# Altium PCB PCB.PcbDoc
Units mm, origin at the board's own origin, x right, y up, seen from the top; angles counter-clockwise.
Board outline 83.5 x 99.4 mm, 4 copper layers (Signal Top, Int1 (GND), Int2 (PWR), Signal Bottom), stack 1.696 mm thick; 145 components, 109 nets, 491 pads, 48 vias.
Unrouted connection lines stored in the file: 207.
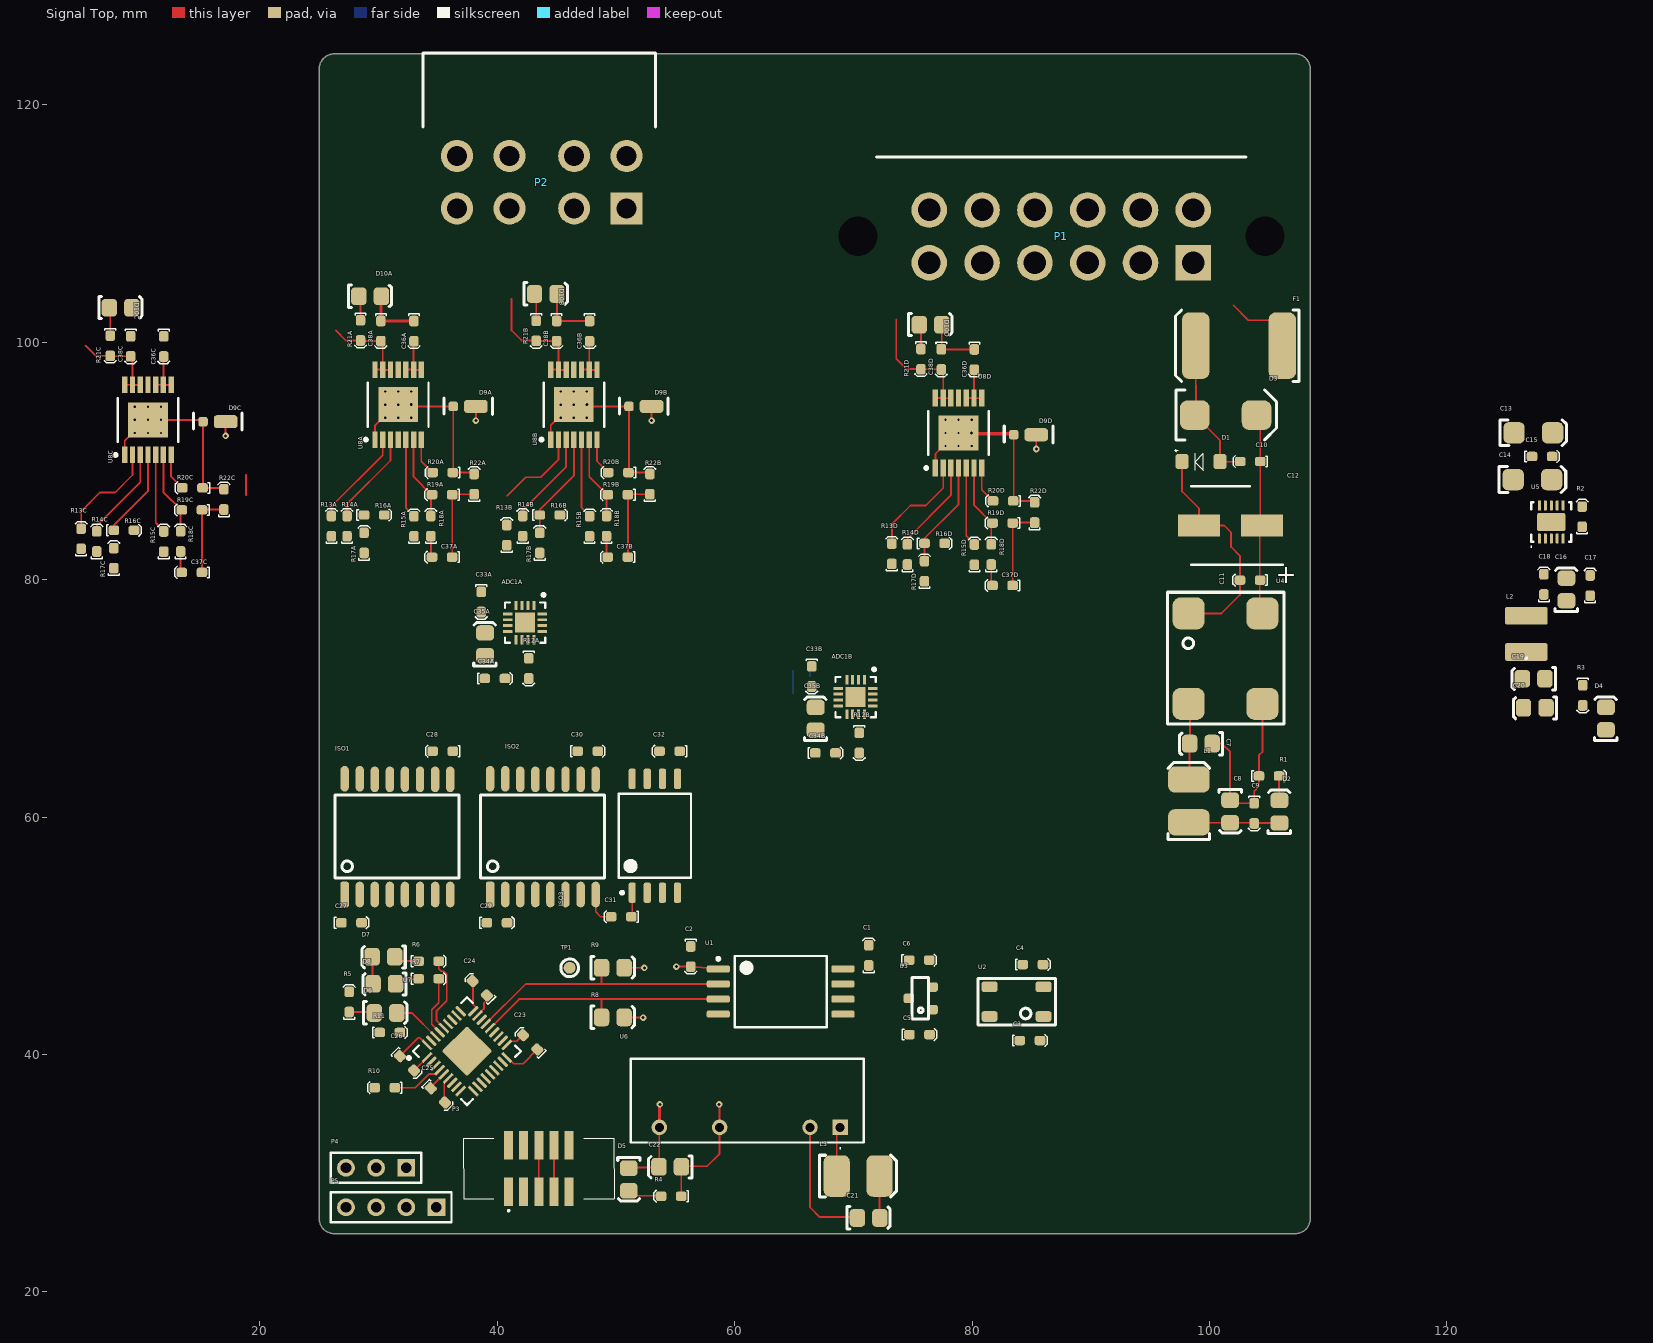
[diagram p0: Signal Top view]
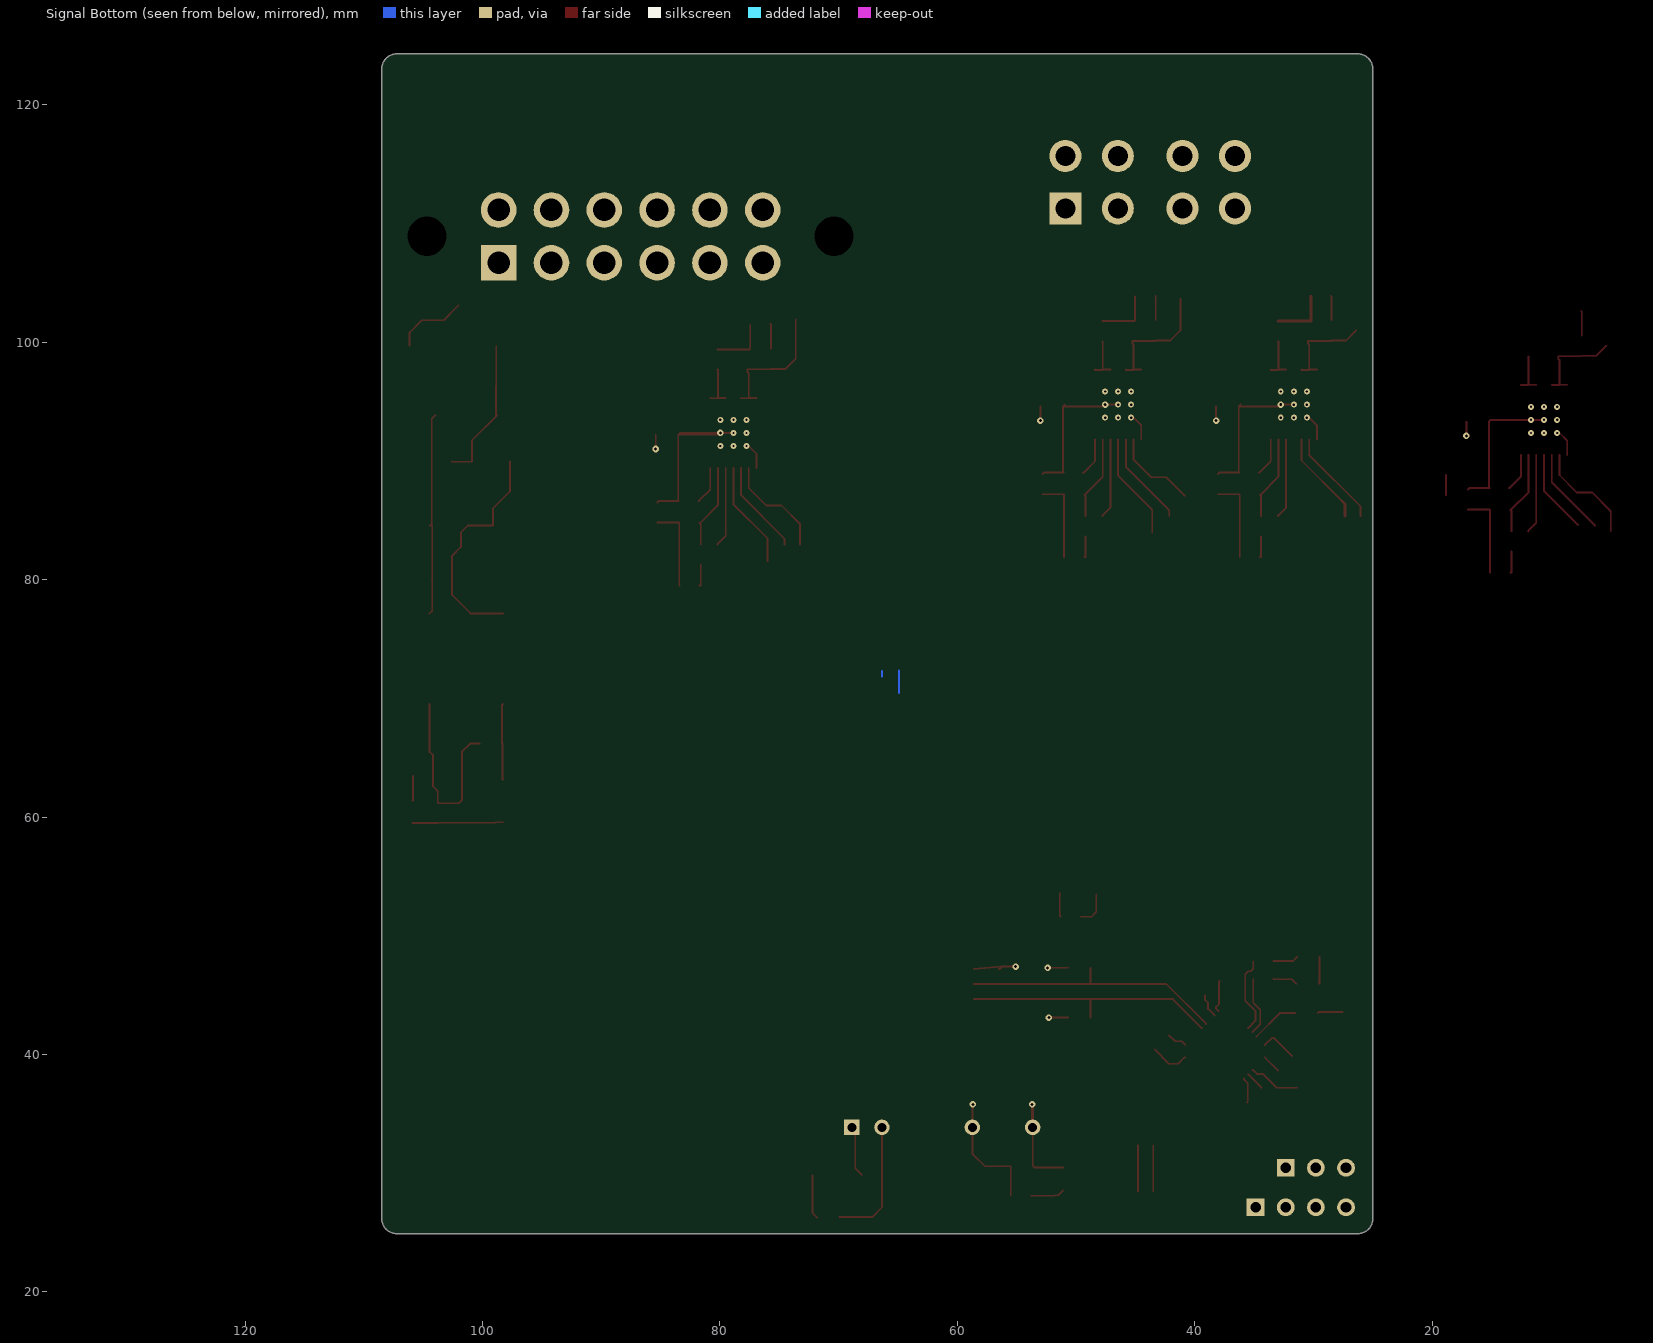
[diagram p1: Signal Bottom view, seen from below]
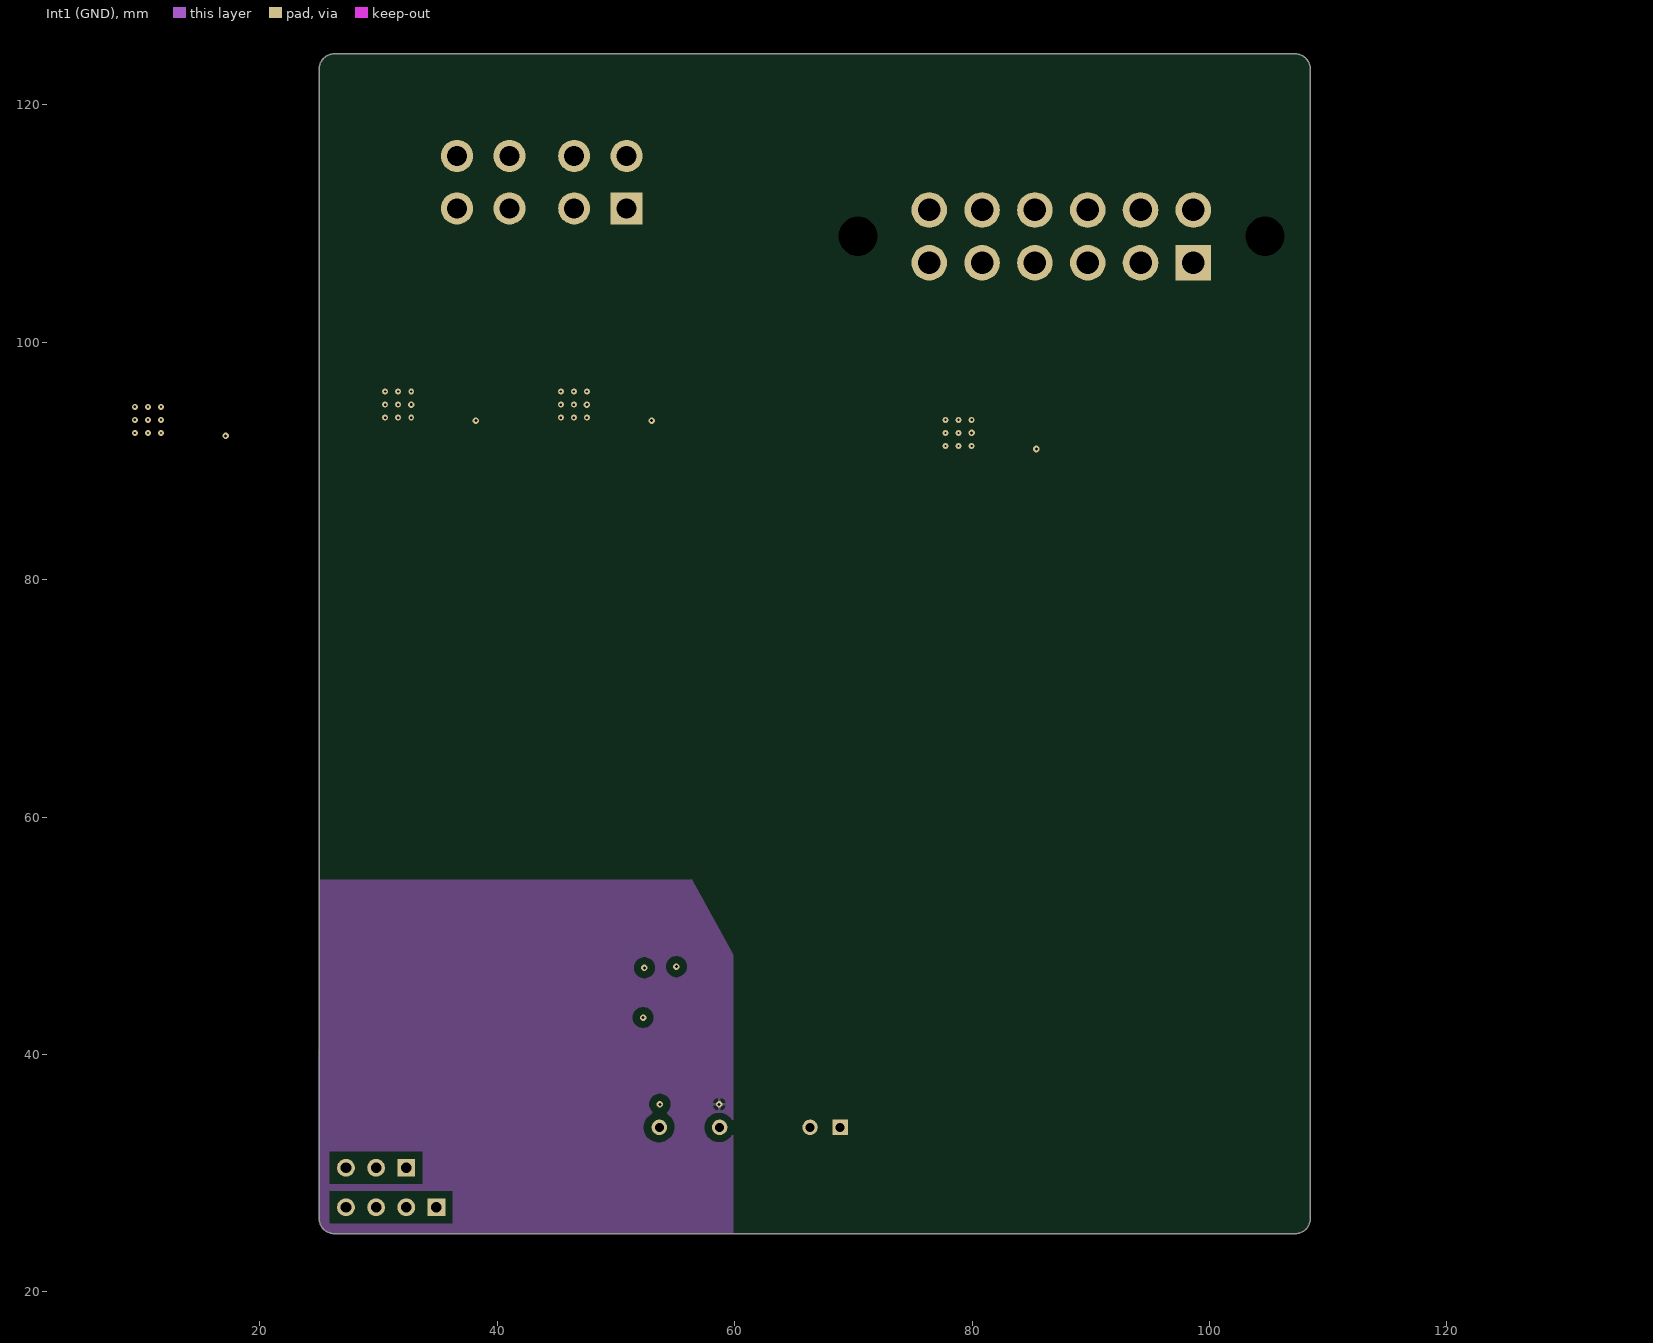
[diagram p2: Int1 (GND)]
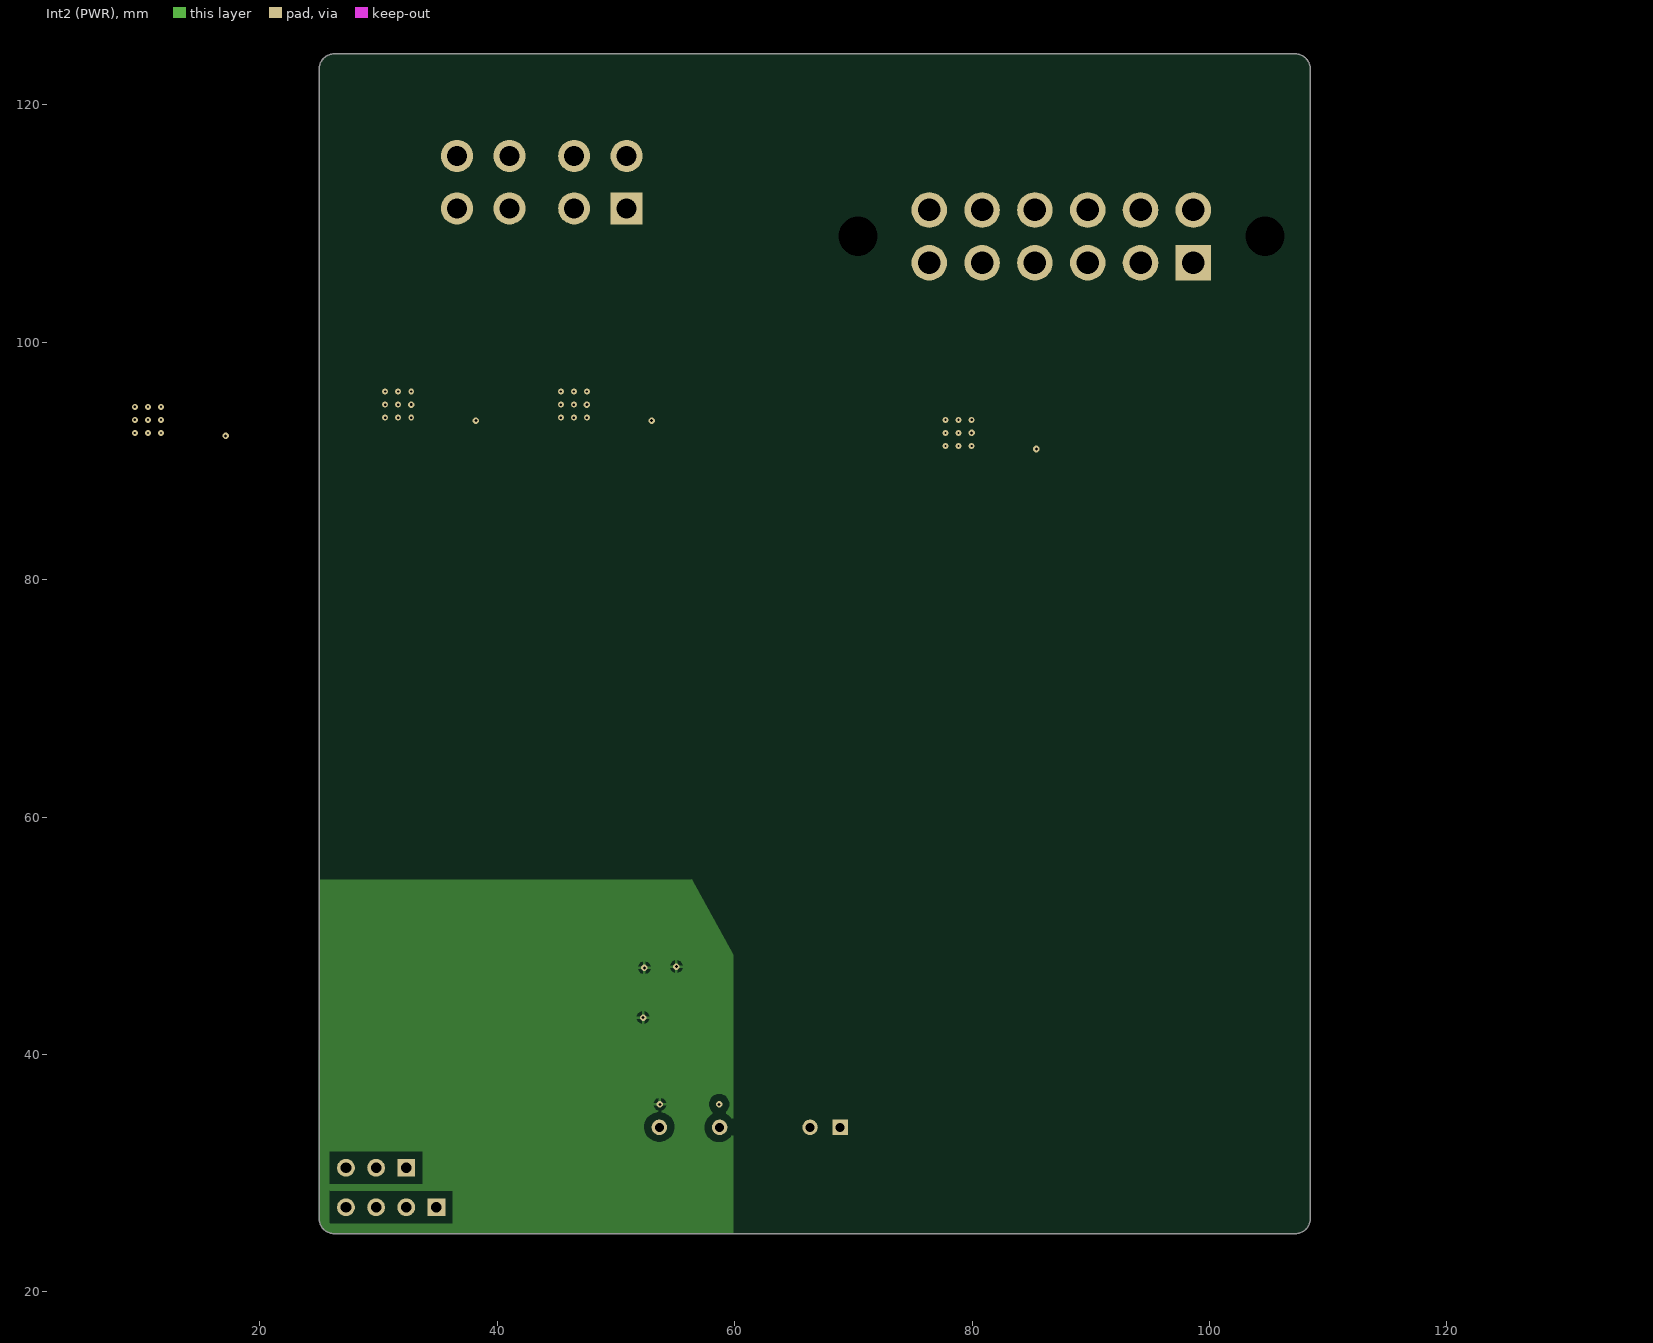
[diagram p3: Int2 (PWR)]

## Layer stack, top to bottom
Top Solder: solder mask 0.0254, SM-003, Dk 4
Signal Top: signal copper 0.07
Dielectric 1: prepreg 0.2104, PP-017, Dk 4.4
Int1 (GND): signal copper 0.035
Dielectric 2: core 1.065, Core-039, Dk 4.5
Int2 (PWR): signal copper 0.035
Dielectric 3: prepreg 0.2104, PP-017, Dk 4.4
Signal Bottom: signal copper 0.07
Bottom Solder: solder mask 0.0254, SM-003, Dk 4

## Board outline
25,26.17 ccw(c26.27,26.17) 26.27,24.9 107.23,24.9 ccw(c107.23,26.17) 108.5,26.17 108.5,123.03 ccw(c107.23,123.03) 107.23,124.3 26.27,124.3 ccw(c26.27,123.03) 25,123.03

## Design rules (kind name [scope] priority, off if disabled: settings)
Clearance [All] p1: gap=0.254 ignorepadtopadclearanceinfootprint=FALSE except(0: Arc-Hole Track-Hole SMDPad-Hole THPad-Hole Via-Hole Fill-Hole Region-Hole Text-Hole; 0.1: THPad-THPad; 0.152: Arc-SMDPad Track-SMDPad SMDPad-SMDPad; 0.2: Arc-THPad Track-THPad SMDPad-THPad THPad-Via; 0.203: Arc-Arc Arc-Track Arc-Region Track-Track Track-Region SMDPad-Region THPad-Region Via-Region Fill-Region Poly-Region Region-Region; 0.6: Arc-Poly Track-Poly SMDPad-Poly THPad-Poly Via-Poly Fill-Poly Poly-Poly)
Height [All] p1: minheight=0 maxheight=50 prefheight=12.7
HoleSize [All] p1: absolutevalues=TRUE maxlimit=10 minlimit=0.025 maxpercent=80.000 minpercent=20.000
MinimumSolderMaskSliver [All] p1 off: minsoldermaskwidth=0.254
NetAntennae [All] p1 off: netantennaetolerance=0
PlaneClearance [All] p1: clearance=0.4
PlaneConnect [All] p1: pad.planeconnectstyle=Relief pad.reliefexpansion=0.508 pad.reliefentries=4 pad.reliefconductorwidth=0.8 pad.reliefairgap=0.254 via.planeconnectstyle=Direct via.reliefexpansion=0.508 via.reliefentries=4 via.reliefconductorwidth=0.8 via.reliefairgap=0.254
PolygonConnect [All] p1: connectstyle=Relief reliefconductorwidth=0.254 reliefentries=4 polygonreliefangle="90 Angle" airgapwidth=0.254
RoomDefinition HSD1 [InComponentClass('HSD1')] p1: confinementstyle=ConfineIn formatcopy=FALSE lockcomponents=FALSE outline 40,81 25.2,81 25.2,105.3 40,105.3
RoomDefinition HSD2 [InComponentClass('HSD2')] p2: confinementstyle=ConfineIn formatcopy=TRUE lockcomponents=FALSE outline 54.8,81 40,81 40,105.3 54.8,105.3
RoomDefinition HSD3 [InComponentClass('HSD3')] p3: confinementstyle=ConfineIn formatcopy=TRUE lockcomponents=FALSE outline 18.916,79.712 4.116,79.712 4.116,104.012 18.916,104.012
RoomDefinition HSD4 [InComponentClass('HSD4')] p4: confinementstyle=ConfineIn formatcopy=TRUE lockcomponents=FALSE outline 87.216,78.612 72.416,78.612 72.416,102.912 87.216,102.912
RoomDefinition TopLevel [InComponentClass('TopLevel')] p5: confinementstyle=ConfineIn formatcopy=TRUE lockcomponents=FALSE outline 25.126,108.736 25.126,139.144 108.58,139.144 108.58,104.346 66.492,104.346 66.492,108.736
RoomDefinition ADC2 [InComponentClass('ADC2')] p6: confinementstyle=ConfineIn formatcopy=TRUE lockcomponents=FALSE outline 72.85,73.025 63.65,73.025 63.65,64.625 72.85,64.625
RoomDefinition ADC1 [InComponentClass('ADC1')] p7: confinementstyle=ConfineIn formatcopy=TRUE lockcomponents=FALSE outline 45,79.3 35.8,79.3 35.8,70.9 45,70.9
RoomDefinition CAN [InComponentClass('CAN')] p8: confinementstyle=ConfineIn formatcopy=TRUE lockcomponents=FALSE outline 55.45,40.325 87.425,40.325 87.425,50.15 55.45,50.15
RoomDefinition Microcontroller [InComponentClass('Microcontroller')] p9: confinementstyle=ConfineIn formatcopy=TRUE lockcomponents=FALSE outline 25.625,25.375 51.8,25.375 51.8,49.55 25.625,49.55
RoomDefinition "ADC Chip Select Isolation" [InComponentClass('ADC Chip Select Isolation')] p10: confinementstyle=ConfineIn formatcopy=TRUE lockcomponents=FALSE outline 49.675,50.35 56.875,50.35 56.875,66.4 49.675,66.4
RoomDefinition "High-Side Driver Enable Pin Isolator" [InComponentClass('High-Side Driver Enable Pin Isolator')] p11: confinementstyle=ConfineIn formatcopy=TRUE lockcomponents=FALSE outline 38.2,50.25 49.45,50.25 49.45,66.4 38.2,66.4
RoomDefinition "Contoller Peripheral Comms Isolation" [InComponentClass('Contoller Peripheral Comms Isolation')] p12: confinementstyle=ConfineIn formatcopy=TRUE lockcomponents=FALSE outline 25.95,50.25 37.2,50.25 37.2,66.4 25.95,66.4
RoutingVias [All] p1: holewidth=0.711 width=1.27 viastyle="Through Hole" minholewidth=0.711 minwidth=1.27 maxholewidth=0.711 maxwidth=1.27
SilkToSilkClearance [All] p1 off: silktosilkclearance=0.254
SilkToSolderMaskClearance [IsPad] p1 off: minsilkscreentomaskgap=0.254 clearancetoexposedcopper=TRUE
SolderMaskExpansion [All] p1: expansion=0.051 istentingtop=FALSE
SupplyNets "Schematic Supply Nets_8" [InNet('0V_(ISO)')] p1: voltage=0.000
SupplyNets "Schematic Supply Nets_7" [InNet('VBAT_F')] p2: voltage=0.000
SupplyNets "Schematic Supply Nets_6" [InNet('GLV-')] p3: voltage=0.000
SupplyNets "Schematic Supply Nets_5" [InNet('3V3')] p4: voltage=0.000
SupplyNets "Schematic Supply Nets_4" [InNet('VBAT_D')] p5: voltage=0.000
SupplyNets "Schematic Supply Nets_3" [InNet('5V')] p6: voltage=0.000
SupplyNets "Schematic Supply Nets_2" [InNet('GLV+')] p7: voltage=0.000
SupplyNets "Schematic Supply Nets_1" [InNet('VBAT_C')] p8: voltage=0.000
SupplyNets "Schematic Supply Nets" [InNet('0V')] p9: voltage=0.000
Width [All] p1: maxlimit=0.254 minlimit=0.254 preferedwidth=0.254
22 further rules are at their usual default settings.

## Classes and differential pairs
component class ADC2: ADC1B C33B C34B C35B R12B
component class HSD3: C36C C38C D9C
component class HSD2: C36B C37B C38B D9B D10B R14B R15B R16B R17B R18B R19B R20B R21B R22B U8B
component class HSD1: C36A C37A C38A D9A D10A R13A R14A R15A R16A R17A R18A R19A R20A R21A R22A U8A
component class ADC1: ADC1A C33A C34A C35A R12A
channel class "High-Side Driver": HSD1 HSD2 HSD3 HSD4
channel class "ADC GPIO Expander": ADC1 ADC2
component class TopLevel: P1 P2
component class "Power Supply": C7 C8 C9 C10 C11 C12 C13 C14 C15 C16 C17 C18 C19 C20 C21 C22 D1 D2 D3 D4 D5 F1 L1 L2 L3 R1 R2 R3 R4 U4 U5 U6
component class Microcontroller: C23 C24 C25 C26 D6 D7 D8 P3 P4 P5 R5 R6 R7 R8 R9 R10 R11 TP1 U7
component class HSD4: *_HSD2 C36D C37D C38D D9D D10D R13D R14D R15D R16D R17D R18D R19D R20D R21D R22D U8D
component class "High-Side Driver Enable Pin Isolator": C29 C30 ISO2
component class "Contoller Peripheral Comms Isolation": C27 C28 ISO1
component class CAN: C1 C2 C3 C4 C5 C6 U1 U2 U3
component class "ADC Chip Select Isolation": C32 ISO3

## Components (designator, comment, footprint, x,y, rotation, side; value= is the part's Value field where it differs from the comment)
ADC1A "ADS7028IRTER-Symbol-1" WFQN-16 42.35,76.375 r270 top (schematic designator ADC1)
ADC1B "ADS7028IRTER-Symbol-1" WFQN-16 70.2,70.1 r270 top (schematic designator ADC1)
C1 "100nF" 0603 71.3,47.5 r90 top
C2 "100nF" 0603 56.3,49.1 r270 top
C3 "100pF" 0603 84.025,41.175 r0 top
C4 "100pF" 0603 84.275,47.575 r0 top
C5 "100pF" 0603 74.725,41.675 r0 top
C6 "100pF" 0603 74.7,47.95 r0 top
C7 "10uF" 0805 99.274,66.162 r180 top
C8 "10uF" 0805 101.774,60.462 r270 top
C9 "100nF" 0603 103.774,61.162 r270 top
C10 "100nF" 0603 104.293,89.957 r180 top
C11 "100nF" 0603 104.274,79.962 r180 top
C12 "47uF" "CHEMI-CON ELCO" 101.774,84.562 r180 top
C13 "4.7uF" "1206 CAP" 128.479,92.379 r0 top
C14 "4.7uF" "1206 CAP" 128.404,88.432 r0 top
C15 "100nF" 0603 127.179,90.379 r0 top
C16 "1µF" 0805 130.054,79.182 r90 top
C17 "10nF" 0603 132.079,78.657 r90 top
C18 "100nF" 0603 128.179,78.757 r90 top
C19 "10uF" 0805 127.304,71.632 r180 top
C20 "10uF" 0805 127.404,69.182 r180 top
C21 "10uF" 0805 71.304,26.257 r0 top
C22 "10uF" 0805 54.554,30.507 r180 top
C23 "100nF" 0603 43.377,40.423 r135 top
C24 "100nF" 0603 39.125,44.975 r135 top
C25 "100nF" 0603 34.398,37.152 r315 top
C26 "100nF" 0603 31.798,39.852 r315 top
C27 "100nF" 0603 26.869,51.1 r0 top
C28 "100nF" 0603 36.26,65.55 r180 top
C29 "100nF" 0603 39.126,51.1 r0 top
C30 "100nF" 0603 46.775,65.55 r0 top
C31 "100nF" 0603 51.3,51.6 r180 top
C32 "100nF" 0603 55.375,65.55 r180 top
C33A "100nF" 0603 38.65,78.975 r270 top (schematic designator C33)
C33B "100nF" 0603 66.5,72.7 r270 top (schematic designator C33)
C34A "100nF" 0603 38.95,71.675 r0 top (schematic designator C34)
C34B "100nF" 0603 66.8,65.4 r0 top (schematic designator C34)
C35A "1µF" 0805 38.95,74.575 r90 top (schematic designator C35)
C35B "1µF" 0805 66.8,68.3 r90 top (schematic designator C35)
C36A "100nF" 0603 32.984,101.788 r270 top (schematic designator C36)
C36B "100nF" 0603 47.784,101.788 r270 top (schematic designator C36)
C36C "100nF" 0603 11.9,100.5 r270 top (schematic designator C36)
C36D "100nF" 0603 80.2,99.4 r270 top (schematic designator C36)
C37A "100nF" 0603 36.206,81.9 r180 top (schematic designator C37)
C37B "100nF" 0603 51.006,81.9 r180 top (schematic designator C37)
C37C "100nF" 0603 15.123,80.612 r180 top (schematic designator C37)
C37D "100nF" 0603 83.423,79.512 r180 top (schematic designator C37)
C38A "22nF" 0603 30.2,101.8 r270 top (schematic designator C38)
C38B "22nF" 0603 45,101.8 r270 top (schematic designator C38)
C38C "22nF" 0603 9.117,100.512 r270 top (schematic designator C38)
C38D "22nF" 0603 77.416,99.412 r270 top (schematic designator C38)
D1 "PMEG100T10ELR-QX" "NXP SOD123W" 99.293,89.957 r0 top
D2 "Red" "0805 LED" 105.874,60.462 r90 top
D3 "SM6T36CAY" "ST SMB DIODE" 101.374,93.862 r180 top
D4 "Red" "0805 LED" 133.379,68.307 r90 top
D5 "Red" "0805 LED" 51.104,29.457 r270 top
D6 "Yellow" "0805 LED" 30.6,43.525 r0 top
D7 "Yellow" "0805 LED" 30.4,48.2 r180 top
D8 "Yellow" "0805 LED" 30.475,45.925 r180 top
D9A "MSX1PJ-M3/89A" "VISHAY DO-219" 38.2,94.6 r180 top (schematic designator D9)
D9B "MSX1PJ-M3/89A" "VISHAY DO-219" 53,94.6 r180 top (schematic designator D9)
D9C "MSX1PJ-M3/89A" "VISHAY DO-219" 17.116,93.312 r180 top (schematic designator D9)
D9D "MSX1PJ-M3/89A" "VISHAY DO-219" 85.416,92.212 r180 top (schematic designator D9)
D10A "Red" "0805 LED" 29.3,103.9 r0 top (schematic designator D10)
D10B "Red" "0805 LED" 44.1,104.1 r0 top (schematic designator D10)
D10C "Red" "0805 LED" 8.279,102.938 r0 top (schematic designator D10)
D10D "Red" "0805 LED" 76.516,101.512 r0 top (schematic designator D10)
F1 "0ZCF0100AF2A" 2920 106.149,99.712 r180 top
ISO1 "ADum1401" "AD 16-SOIC" 32.86,58.352 r0 top
ISO2 "ADuM1400" "AD 16-SOIC" 45.117,58.352 r0 top
ISO3 "ADuM225N" AD-SOIC-8W 53.275,58.425 r90 top
L1 "12uH" 1812 98.274,61.362 r90 top
L2 "4.7uH" SRN3015TA-4R7M 126.704,75.432 r90 top
L3 "12uH" 1812 70.404,29.757 r0 top
P1 "DTF13-12P" DTF13-12P 87.536,111.15 r180 top
P2 "ATF13-08" ATF13-08 43.755,113.49 r180 top
P3 "1.27mm" 3221-10-0300-00 43.5,30.4 r0 top
P4 "2.54mm" "TH 2.54mm Header 1x3" 32.335,30.45 r180 top
P5 "2.54mm" "TH 2.54mm Header 1x4" 34.875,27.125 r180 top
R1 "20K" 0603 104.174,63.462 r0 top
R2 "100K" 0603 131.404,84.457 r90 top
R3 "2K" 0603 131.454,71.107 r270 top
R4 "1k" 0603 55.504,28.057 r180 top
R5 "500R" 0603 27.525,43.575 r90 top
R6 "500R" 0603 33.375,47.85 r0 top
R7 "500R" 0603 33.375,46.375 r0 top
R8 "5.1k" 0805 49.75,43.15 r0 top
R9 "5.1k" 0805 49.75,47.325 r0 top
R10 "10k" 0603 31.375,37.2 r180 top
R11 "10k" 0603 30.1,41.85 r0 top
R12A "100K" 0603 42.65,73.375 r270 top (schematic designator R12)
R12B "100K" 0603 70.5,67.1 r270 top (schematic designator R12)
R13A "10k" 0603 26.034,83.663 r90 top (schematic designator R13)
R13B "10k" 0603 40.8,82.9 r90 top (schematic designator R13)
R13C "10k" 0603 4.939,82.598 r90 top (schematic designator R13)
R13D "10k" 0603 73.244,81.334 r90 top (schematic designator R13)
R14A "10k" 0603 27.346,83.663 r90 top (schematic designator R14)
R14B "10k" 0603 42.146,83.663 r90 top (schematic designator R14)
R14C "10k" 0603 6.262,82.375 r90 top (schematic designator R14)
R14D "10k" 0603 74.562,81.275 r90 top (schematic designator R14)
R15A "10k" 0603 32.981,83.65 r90 top (schematic designator R15)
R15B "10k" 0603 47.781,83.65 r90 top (schematic designator R15)
R15C "10k" 0603 11.898,82.362 r90 top (schematic designator R15)
R15D "10k" 0603 80.198,81.262 r90 top (schematic designator R15)
R16A "10k" 0603 28.781,85.45 r0 top (schematic designator R16)
R16B "10k" 0603 43.581,85.45 r0 top (schematic designator R16)
R16C "10k" 0603 7.698,84.162 r0 top (schematic designator R16)
R16D "10k" 0603 75.998,83.062 r0 top (schematic designator R16)
R17A "10k" 0603 28.781,82.25 r90 top (schematic designator R17)
R17B "10k" 0603 43.581,82.25 r90 top (schematic designator R17)
R17C "10k" 0603 7.698,80.962 r90 top (schematic designator R17)
R17D "10k" 0603 75.998,79.862 r90 top (schematic designator R17)
R18A "10k" 0603 34.409,83.663 r90 top (schematic designator R18)
R18B "10k" 0603 49.209,83.663 r90 top (schematic designator R18)
R18C "10k" 0603 13.325,82.375 r90 top (schematic designator R18)
R18D "10k" 0603 81.625,81.275 r90 top (schematic designator R18)
R19A "1k" 0603 36.209,87.163 r180 top (schematic designator R19)
R19B "1k" 0603 51.009,87.163 r180 top (schematic designator R19)
R19C "1k" 0603 15.125,85.875 r180 top (schematic designator R19)
R19D "1k" 0603 83.425,84.775 r180 top (schematic designator R19)
R20A "24k" 0603 36.256,89.025 r180 top (schematic designator R20)
R20B "24k" 0603 51.056,89.025 r180 top (schematic designator R20)
R20C "24k" 0603 15.173,87.737 r180 top (schematic designator R20)
R20D "24k" 0603 83.473,86.637 r180 top (schematic designator R20)
R21A "10k" 0603 28.481,101.85 r270 top (schematic designator R21)
R21B "10k" 0603 43.281,101.818 r270 top (schematic designator R21)
R21C "10k" 0603 7.398,100.562 r270 top (schematic designator R21)
R21D "10k" 0603 75.698,99.429 r270 top (schematic designator R21)
R22A "1k" 0603 38.057,87.2 r90 top (schematic designator R22)
R22B "1k" 0603 52.857,87.2 r90 top (schematic designator R22)
R22C "1k" 0603 16.973,85.911 r90 top (schematic designator R22)
R22D "1k" 0603 85.273,84.811 r90 top (schematic designator R22)
TP1 "Test Point Small" "SMD Test Point 1mm" 46.1,47.3 r0 top
U1 "ISO1042" TI-SOIC-8 63.875,45.3 r0 top
U2 "B82787C0104H002" "TDK 4-PC Pad" 86.025,43.2 r180 top value="100µH @ 100kHz"
U3 "NUP2105L" "ON SOT-23" 75.675,44.725 r90 top
U4 "744272121" "Wurth 4-PC Pad" 104.474,69.542 r90 top value="120uH @ 100kHz"
U5 "LM536015QDSXRQ1" TI_10_WSON 128.804,84.857 r90 top
U6 "RK-053.3S/H6" RK-053.3S/H6 68.894,33.854 r180 top
U7 "STM32F103T8U6" STM_QFN-36 37.45,40.275 r45 top
U8A "TPS1HTC30AQPWPRQ1" TI_14_TSSOP 31.656,94.75 r90 top (schematic designator U8)
U8B "TPS1HTC30AQPWPRQ1" TI_14_TSSOP 46.456,94.75 r90 top (schematic designator U8)
U8C "TPS1HTC30AQPWPRQ1" TI_14_TSSOP 10.573,93.462 r90 top (schematic designator U8)
U8D "TPS1HTC30AQPWPRQ1" TI_14_TSSOP 78.867,92.362 r90 top (schematic designator U8)

## Footprints (in the part's own frame and the unit in brackets; to place one, negate y for a bottom-side part, rotate by r counter-clockwise, add the part's x,y. Pads: shape width x height; smd on the part's side, far side on the other; paste and mask are expansions set on the pad)
0603 [mm]
  rrect50% 0.9x0.8 smd: 1(0,0) 2(1.7,0)
  silkscreen extent -0.6,-0.5 2.3,0.5, body extent 0.05,-0.42 1.65,0.43, height 0.6
0805 [mm]
  rrect50% 1.3x1.5 smd: 1(-0.962,-0.026) 2(0.938,-0.026)
  silkscreen extent -1.85,-0.95 1.8,0.93, body extent -1,-0.65 1,0.66, height 0.73
"0805 LED" [mm]
  rrect50% 1.3x1.5 smd: A(-0.962,-0.026) K(0.938,-0.026)
  silkscreen extent -1.85,-0.95 1.8,0.93, body extent -1.09,-0.63 0.91,0.63, height 1
"1206 CAP" [mm]
  rrect50% 1.8x1.8 smd: 1(-2.81,0) 2(0.44,0)
  silkscreen extent -3.99,-1.09 1.62,1.09, body extent -2.75,-0.79 0.45,0.81, height 1.61
1812 [mm]
  rrect50% 2.2x3.5 smd: 1(-1.8,0) 2(1.8,0)
  silkscreen extent -3.25,-1.75 3.25,1.75, body extent -2.25,-1.6 2.25,1.6, height 2.5
2920 [mm]
  rrect50% 2.3x5.6 smd: 1(0,0) 2(7.3,0)
  silkscreen extent -1.4,-3 9,3, body extent -0.34,-2.81 7.64,2.81, height 1.14
3221-10-0300-00 [mm]
  rect 0.76x2.4 smd: 1(-2.54,-1.95) 2(-2.54,1.95) 3(-1.27,-1.95) 4(-1.27,1.95) 5(0,-1.95) 6(0,1.95) 7(1.27,-1.95) 8(1.27,1.95) 9(2.54,-1.95) 10(2.54,1.95)
  silkscreen extent -6.35,-3.6 6.35,2.55, body extent -6.34,-2.8 6.36,2.8, height 5.25
"AD 16-SOIC" [mil]
  rrect50% 28x85 smd: 1(-225,-192.02)
  oval 28x85 smd: 2(-175,-192.02) 3(-125,-192.02) 4(-75,-192.02) 5(-25,-192.02) 6(25,-192.02) 7(75,-192.02) 8(125,-192.02) 9(125,190) 10(75,189.96) 11(25,189.96) 12(-25,189.96) 13(-75,189.96) 14(-125,189.96) 15(-175,191.98) 16(-225,191.98)
  silkscreen extent -257,-138 155,138, body extent -256,-209 156,209, height 104
AD-SOIC-8W [mm]
  rrect50% 1.7x0.6 smd: 1(-4.8,1.905) 2(-4.8,0.635) 3(-4.8,-0.635) 4(-4.8,-1.905) 5(4.8,-1.905) 6(4.8,-0.635) 7(4.8,0.635) 8(4.8,1.905)
  silkscreen extent -4.92,-3.05 3.55,3.05, body extent -5.16,-3.05 5.16,3.05, height 2.65
ATF13-08 [mm]
  rect 2.7x2.7 hole 1.7: 1(-7.145,2.21)
  round 2.7 hole 1.7: 2(-2.725,2.21) 3(2.725,2.21) 4(7.145,2.21) 5(7.145,-2.21) 6(2.725,-2.21) 7(-2.725,-2.21) 8(-7.145,-2.21)
  silkscreen extent -9.57,-10.87 10.03,-4.67, body extent -18.38,-25.4 18.38,4.5, height 23.66
"CHEMI-CON ELCO" [mm]
  rect 3.55x1.85 smd: 1(-2.65,0) 2(2.65,0)
  silkscreen extent -4.42,-3.3 3.3,3.3, body extent -3.7,-3.4 3.7,3.4, height 6.1
DTF13-12P [mm]
  round 3 hole 3.3 unplated: 0(-17.145,2.22) 0(17.145,2.22)
  rect 3x3 hole 1.9: 1(-11.114,4.45)
  round 3 hole 1.9: 2(-6.664,4.45) 3(-2.214,4.45) 4(2.236,4.45) 5(6.686,4.45) 6(11.136,4.45) 7(11.136,0) 8(6.686,0) 9(2.236,0) 10(-2.214,0) 11(-6.664,0) 12(-11.114,0)
  silkscreen extent -15.56,-4.45 15.59,-4.45, body extent -20.79,-27.74 20.79,6.55, height 23.13
"NXP SOD123W" [mm]
  rrect50% 1.1x1.3 smd: A(1.6,0) K(-1.6,0)
  silkscreen extent -2.2,-0.73 0.2,1.04, body extent -1.75,-0.95 1.75,0.95, height 1.1
"ON SOT-23" [mm] "NUP2105L"
  rrect50% 0.8x0.9 smd: 1(-0.95,-1) 2(0.95,-1) 3(0,1)
  silkscreen extent -1.75,-0.65 1.75,0.75, body extent -1.5,-1.27 1.5,1.28, height 1
RK-053.3S/H6 [mm]
  rect 1.303x1.303 hole 0.76: 1(0,0)
  round 1.303 hole 0.76: 2(2.54,0) 5(10.16,0) 7(15.24,0)
  silkscreen extent -2,-5.78 17.65,1.8, body extent -1.99,-5.78 17.65,1.26, height 10.2
"SMD Test Point 1mm" [mm]
  round 1 smd: 1(0,0)
  silkscreen extent -0.75,-0.75 0.75,0.75
SRN3015TA-4R7M [mm]
  rrect25% 1.5x3.6 smd: 1(-1.525,0) 2(1.525,0)
  silkscreen extent -2.1,-0.05 -2,0.05, body extent -1.46,-1.47 1.61,1.47, height 1.4
"ST SMB DIODE" [mm]
  rrect50% 2.5x2.5 smd: A(2.6,0) K(-2.6,0)
  silkscreen extent -4.28,-2.12 4.17,2.08, body extent -2.88,-1.99 2.72,1.95, height 2.5
STM_QFN-36 [mm]
  rrect50% 1.1x0.25 smd: 1(-2.75,2) 2(-2.75,1.5) 3(-2.75,1) 4(-2.75,0.5) 5(-2.75,0) 6(-2.75,-0.5) 7(-2.75,-1) 8(-2.75,-1.5) 9(-2.75,-2) 19(2.75,-2) 20(2.75,-1.5) 21(2.75,-1) 22(2.75,-0.5) 23(2.75,0) 24(2.75,0.5) 25(2.75,1) 26(2.75,1.5) 27(2.75,2)
  rrect50% 0.25x1.1 smd: 10(-2,-2.75) 11(-1.5,-2.75) 12(-1,-2.75) 13(-0.5,-2.75) 14(0,-2.75) 15(0.5,-2.75) 16(1,-2.75) 17(1.5,-2.75) 18(2,-2.75) 28(2,2.75) 29(1.5,2.75) 30(1,2.75) 31(0.5,2.75) 32(0,2.75) 33(-0.5,2.75) 34(-1,2.75) 35(-1.5,2.75) 36(-2,2.75)
  rrect10% 3x3 smd: 37(0,0)
  silkscreen extent -3.98,-3.21 3.21,3.21, body extent -3.08,-3.08 3.08,3.08, height 1
"TDK 4-PC Pad" [mm]
  rrect50% 1.35x0.9 smd: 1(0,-2.5) 2(0,0) 3(4.55,0) 4(4.55,-2.5)
  silkscreen extent -1,-3.2 5.5,0.7, body extent -0.02,-2.82 4.48,0.38, height 2.8
"TH 2.54mm Header 1x3" [mm]
  rect 1.5x1.5 hole 0.9: 1(0,0)
  round 1.5 hole 0.9: 2(2.54,0) 3(5.08,0)
  silkscreen extent -1.27,-1.27 6.35,1.27, body extent -1.27,-1.27 6.35,1.27, height 9.5
"TH 2.54mm Header 1x4" [mm]
  rect 1.5x1.5 hole 0.9: 1(0,0)
  round 1.5 hole 0.9: 2(2.54,0) 3(5.08,0) 4(7.62,0)
  silkscreen extent -1.27,-1.27 8.89,1.27, body extent -1.27,-1.27 8.89,1.27, height 9.5
TI-SOIC-8 [mm]
  rrect50% 1.95x0.6 smd: 1(-5.25,1.905) 2(-5.25,0.635) 3(-5.25,-0.635) 4(-5.25,-1.905) 5(5.25,-1.905) 6(5.25,-0.635) 7(5.25,0.635) 8(5.25,1.905)
  silkscreen extent -5.37,-3 3.87,3, body extent -5.75,-3 5.75,3, height 2.8
TI_10_WSON [mm]
  rrect50% 0.85x0.25 smd: 1(-1.395,1) 2(-1.395,0.5) 3(-1.395,0) 4(-1.395,-0.5) 5(-1.395,-1) 6(1.395,-1) 7(1.395,-0.5) 8(1.395,0) 9(1.395,0.5) 10(1.395,1)
  rrect25% 1.54x2.4 smd: 11(0,0)
  silkscreen extent -2.12,-1.68 1.67,1.72, body extent -1.58,-1.53 1.58,1.53, height 0.8
TI_14_TSSOP [mm] "TSOP, 14-Leads, Body 5.00x4.40mm, Pitch 0.65mm, Thermal Pad 3.34x2.94mm, IPC Medium Density"
  rect 2.94x3.34 smd: 0(0,0)
  rect 1.4x0.45 smd: 1(-2.95,1.95) 2(-2.95,1.3) 3(-2.95,0.65) 4(-2.95,0) 5(-2.95,-0.65) 6(-2.95,-1.3) 7(-2.95,-1.95) 8(2.95,-1.95) 9(2.95,-1.3) 10(2.95,-0.65) 11(2.95,0) 12(2.95,0.65) 13(2.95,1.3) 14(2.95,1.95)
  silkscreen extent -3.07,-2.55 1.85,2.85, body extent -3.2,-2.55 3.2,2.55, height 1.2
"VISHAY DO-219" [mm]
  rrect50% 0.8x0.8 smd: A(1.9,0)
  rrect50% 2x1.1 smd: K(0,0)
  silkscreen extent -1.4,-0.73 2.7,0.7
WFQN-16 [mm]
  rect 0.8x0.25 smd: 1(-1.45,0.75) 2(-1.45,0.25) 3(-1.45,-0.25) 4(-1.45,-0.75) 9(1.45,-0.75) 10(1.45,-0.25) 11(1.45,0.25) 12(1.45,0.75)
  rect 0.25x0.8 smd: 5(-0.75,-1.45) 6(-0.25,-1.45) 7(0.25,-1.45) 8(0.75,-1.45) 13(0.75,1.45) 14(0.25,1.45) 15(-0.25,1.45) 16(-0.75,1.45)
  rect 1.68x1.68 smd: 17(0,0)
  silkscreen extent -2.47,-1.7 1.7,1.7, body extent -1.6,-1.6 1.6,1.6, height 0.8
"Wurth 4-PC Pad" [mm]
  rrect50% 2.7x2.7 smd: 1(7.62,6.22) 2(0,6.22) 3(0,0) 4(7.62,0)
  silkscreen extent -1.7,-1.8 9.4,8, body extent -1.19,-1.24 8.81,7.46, height 6.2

## Part data
ADC1A ADC1B: library part ADS7028IRTER, "IC ADC 12BIT SAR 16WQFN", Manufacturer="Texas Instruments", Complex IC=1, Digikey Link=https://www.digikey.com.au/en/products/detail/texas-instruments/ADS7028IRTER/12696020?s=N4IgTCBcDaIIIBEDKB2ADGAHASQEoBUBRXEAXQF8g, Digikey Part Number=ADS7028IRTER, Part Number=ADS7028IRTER
C1 C2 C9 C10 C11 C15 C18 C23 C24 C25 C26 C27 C28 C29 C30 C31 C32 C33A C33B C34A C34B C36A C36B C36C C36D C37A C37B C37C C37D: library part GCM188L81H104KA57D, Digikey Part Number=490-6049-1-ND, Manufacturer=muRata, Rated Voltage=50V, Temperature Rating=X8L, Tolerance=±10%, Material=MLCC, Part Number=GCM188L81H104KA57D
C3 C4 C5 C6: library part GRM1885C1H101JA01D, Digikey Part Number=490-1427-1-ND, Manufacturer="Murata Electronics", Rated Voltage=50V, Temperature Rating="C0G, NP0", Tolerance=±5%, Material=MLCC, Part Number=GRM1885C1H101JA01D
C7 C8 C19 C20 C21 C22: library part GRM21BR6YA106KE43L, Digikey Part Number=490-10514-6-ND, Manufacturer=muRata, Rated Voltage=50V, Temperature Rating=X5R, Tolerance=10%, Material=MLCC, Part Number=GRM21BR6YA106KE43L
C12: library part HHXA350ARA470MF61G, Part Number=HHXA350ARA470MF61G
C13 C14: library part GRM31CR71H475KA12K, Digikey Part Number=490-GRM31CR71H475KA12KTR-ND, Manufacturer="Murata Electronics", Rated Voltage=50V, Temperature Rating=X7R, Tolerance=±10%, Material=MLCC, Part Number=GRM31CR71H475KA12K
C16 C35A C35B: library part GCM21BR71H105KA03L, Digikey Part Number=490-10675-1-ND, Manufacturer=muRata, Rated Voltage=50V, Temperature Rating=X7R, Tolerance=±10%, Material=MLCC, Part Number=GCM21BR71H105KA03L
C17: library part GCM188L81H103KA03D, Digikey Part Number=490-GCM188L81H103KA03DCT-ND, Manufacturer=muRata, Rated Voltage=50V, Temperature Rating=X8L, Tolerance=±10%, Material=MLCC, Part Number=GCM188L81H103KA03D
C38A C38B C38C C38D: library part GCM188R71H223KA37J, Digikey Part Number=490-8022-2-ND, Manufacturer="Murata Electronics", Rated Voltage=50V, Temperature Rating=X7R, Tolerance=±10%, Material=MLCC, Part Number=GCM188R71H223KA37J
D1: Breakdown Voltage="100 V", Digikey Part Number=1727-PMEG100T10ELR-QXCT-ND, Forward Voltage="0.75 V @ 1A", Manufacturer="Nexperia USA Inc.", Rated Power="680 mW", Part Number=PMEG100T10ELR-QX
D2 D4 D5 D10A D10B D10C D10D: library part SML-210LTT86, "Red LED Indication - Discrete 1.75V 0805 (2012 Metric)", Digikey Part Number=511-1286-1-ND, Manufacturer="ROHM Semiconductor", Colour=Red, Part Number=SML-210LTT86
D3: Breakdown Voltage="30.8 V", Digikey Part Number=497-10804-1-ND, Manufacturer=STMicroelectronics, Rated Power=600W, Forward Voltage="30.8 V", Part Number=SM6T36CAY
D6 D7 D8: library part SML-211YTT86, "Yellow LED Indication - Discrete 1.75V 0805 (2012 Metric)", Digikey Part Number=511-1293-1-ND, Manufacturer="ROHM Semiconductor", Colour=Yellow, Part Number=SML-211YTT86
D9A D9B D9C D9D: Breakdown Voltage=600V, Manufacturer="Vishay General Semiconductor - Diodes Division", Part Number=MSX1PJ-M3/89A
F1: "PTC RESET FUSE 60V 1A 292", Digikey Part Number=507-2070-1-ND, Manufacturer="Littelfuse Inc.", Digikey Link=https://www.digikey.com/product-detail/en/bel-fuse-inc/0ZCF0100AF2A/507-2070-1-ND/6210547, Part Number=0ZCF0100AF2A
ISO1: library part ADuM1401, "General Purpose Digital Isolator 2500Vrms 4 Channel 1Mbps 25kV/µs CMTI 16-SOIC (0.295\", 7.50mm Width)", Manufacturer="Analog Devices", Complex IC=0, Part Number=ADuM1401
ISO2: "General Purpose Digital Isolator 2500Vrms 4 Channel 1Mbps 25kV/µs CMTI 16-SOIC (0.295\", 7.50mm Width)", Digikey Part Number=ADUM1400WSRWZ-ND, Manufacturer="Analog Devices", Complex IC=0, Digikey Link=https://www.digikey.com/product-detail/en/analog-devices-inc/ADUM1400WSRWZ/ADUM1400WSRWZ-ND/1873713, Part Number=ADuM1400
ISO3: "DIGITAL ISOLATOR, DUAL CHANNEL", Manufacturer="Analogue Devices", Complex IC=0, Part Number=ADuM225N
L1 L3: library part RLS-126, Digikey Part Number=945-3429-ND, Manufacturer=Recom, Rated Current="0.8 A", Tolerance=0.2, Impedance=230mOhm, Material=Wirewound, Part Number=RLS-126
L2: library part SRN4018-4R7M, Digikey Part Number=SRN3015TA-4R7MCT-ND, Manufacturer=Bourns, Rated Current=1.9A, Tolerance=0.2, Impedance=84mOhms, Material=Wirewound, Part Number=SRN4018-4R7M
P1: Digikey Part Number=1734-1861-ND, Angle=90, Contact="Copper Alloy", Digikey Link=https://www.digikey.com/products/en?keywords=dtf13-12pa, Flange=No, Part Number=DTF13-12P, Pitch=4.45mm, Positions=12, Row Spacing=4.45mm
P3: library part "SMD 1.27mm Header 2x5 (3221-10-0300-00)", Angle=0, Contact=NA, Flange=No, Part Number="SMD 1.27mm Header 2x5 (3221-10-0300-00)", Pitch=1.27mm, Positions=10, Row Spacing=1.27mm
P4: library part "TH 2.54mm Header 1x3", Angle=0, Contact=NA, Flange=No, Part Number="TH 2.54mm Header 1x3", Pitch=2.54mm, Positions=3, Row Spacing=2.54mm
P5: library part "TH 2.54mm Header 1x4", Angle=0, Contact=NA, Flange=No, Part Number="TH 2.54mm Header 1x4", Pitch=2.54mm, Positions=4, Row Spacing=2.54mm
R1: library part RC0603FR-0720KL, Digikey Part Number=311-20.0KHRCT-ND, Manufacturer=YAGEO, Rated Power=0.1W, Tolerance=0.01, Material=FR-07, Part Number=RC0603FR-0720KL
R2 R12A R12B: library part RC0603FR-07100KL, Manufacturer=YAGEO, Rated Power=0.1W, Tolerance=0.01, Material=FR-07, Part Number=RC0603FR-07100KL
R3: library part RC0603FR-072KL, Digikey Part Number=311-2.00KHRCT-ND, Manufacturer=YAGEO, Rated Power=0.1W, Tolerance=0.01, Material=FR-07, Part Number=RC0603FR-072KL
R4 R19A R19B R19C R19D R22A R22B R22C R22D: library part RC0603FR-071KL, Digikey Part Number=311-1.00KHRCT-ND, Manufacturer=YAGEO, Rated Power=0.1W, Tolerance=0.01, Material=FR-07, Part Number=RC0603FR-071KL
R5 R6 R7: library part RT0603BRD07500RL, Digikey Part Number=13-RT0603BRD07500RL-ND, Manufacturer=YAGEO, Rated Power=0.1W, Tolerance=0.01, Material=FR-07, Part Number=RT0603BRD07500RL
R8 R9: library part RC0805FR075K1L, Digikey Part Number=311-5.10KCRCT-ND, Manufacturer=YAGEO, Rated Power=0.125W, Tolerance=0.01, Material=FR-07, Part Number=RC0805FR075K1L
R10 R11 R13A R13B R13C R13D R14A R14B R14C R14D R15A R15B R15C R15D R16A R16B R16C R16D R17A R17B R17C R17D R18A R18B R18C R18D R21A R21B R21C R21D: library part RC0603FR-0710KL, Digikey Part Number=311-10.0KHRCT-ND, Manufacturer=YAGEO, Rated Power=0.1W, Tolerance=0.01, Material=FR-07, Part Number=RC0603FR-0710KL
R20A R20B R20C R20D: library part RC0603FR-7W24KL, Digikey Part Number=13-RC0603FR-7W24KL-ND, Manufacturer=YAGEO, Rated Power=0.2W, Tolerance=0.01, Part Number=RC0603FR-7W24KL
TP1: library part "SMD Test Point Small", Angle=0, Contact=NA, Flange=No, Part Number="SMD Test Point Small", Pitch=0mm, Positions=1, Row Spacing=0
U1: "IC CAN TRANSCEIVER 1/1 8SOIC", Digikey Part Number=296-ISO1042BQDWVQ1-ND, Manufacturer="Texas Instruments", Part Number=ISO1042
U2: Digikey Part Number=495-4598-1-ND, Manufacturer="EPCOS (TDK)", Rated Current=150mA, Impedance="5.8 kOhms @ 10MHz", Material=Wirewound, Part Number=B82787C0104H002
U3: "Dual Line CAN Bus Protector", Digikey Part Number=NUP2105LT1GOSCT-ND, Manufacturer="ON Semiconductor", Digikey Link=https://www.digikey.com/product-detail/en/on-semiconductor/NUP2105LT1G/NUP2105LT1GOSCT-ND/1485001, Part Number=NUP2105L
U4: Digikey Part Number=732-1489-1-ND, Manufacturer="Wurth Electronics Inc", Rated Current="2.5 A", Impedance="460 Ohms @ 30MHz", Material=Wirewound, Part Number=744272121
U5: "DC DC CONVERTER 5V", Digikey Part Number=296-50359-1-ND, Input Voltage="4.5 to 36 V", Manufacturer="Texas Instruments", Output Current="1.0 A", Output Voltage=5V, Part Number=LM536015QDSXRQ1
U6: "DC DC CONVERTER 3.3V 1W", Input Voltage=5V, Manufacturer=Recom, Output Current=303mA, Output Voltage=3.3V, Part Number=RK-053.3S/H6
U7: "ARM® Cortex®-M3 STM32F1 Microcontroller IC 32-Bit 72MHz 64KB (64K x 8) FLASH QFN", Manufacturer="ST Microelectronics", Digikey Link=https://www.digikey.com/en/products/detail/stmicroelectronics/stm32f103t8u6/1852493, Digikey Part Number=STM32F103T8U6, Part Number=STM32F103T8U6
U8A U8B U8C U8D: "AUTOMOTIVE, 60-V, 6-A, 30-M, ONE", Part Number=TPS1HTC30AQPWPRQ1
P2: Part Number=ATF13-08

## Via types
v1: diameter 0.5, hole 0.2, Signal Top to Signal Bottom, 36 vias
v2: diameter 0.55, hole 0.25, Signal Top to Signal Bottom, 12 vias

## Nets (pads, with @x,y where several pads share a name; then routed paths per layer and width w, separated by ;. In a path a pad name is that pad's centre, name@x,y a point inside that pad or via, vN(x,y) a via of type N, cw(c..) or ccw(c..) an arc to the next point about the centre after c; other vN are vias at no path point)
0V: ADC1A.9 ADC1B.9 C1.1 C3.1 C4.1 C5.1 C6.1 C7.1 C8.1 C9.1 C13.1 C14.1 C15.1 C16.1 C17.1 C19.1 C20.1 C21.1 C28.1 C30.2 C32.1 C33A.1 C33B.1 C34A.1 C34B.1 C35A.1 C35B.1 C37A.1 C37B.1 C37C.1 C37D.1 D9A.K D9B.K D9C.K D9D.K ISO1.9 ISO1.15 ISO2.9 ISO2.15 ISO3.5 R1.1 R3.1 R19A.1 R19B.1 R19C.1 R19D.1 R22A.1 R22B.1 R22C.1 R22D.1 U1.5 U3.3 U4.3 U5.5 U5.10 U5.11 U6.2 | length 60.7
  Signal Top w0.152: C37C.1 15.127,80.612 R19C.1@15.127,85.875 ; R19C.1 15.161,85.911 R22C.1 ; v2(17.116,92.112) D9C.K ; C37A.1 36.211,81.9 R19A.1@36.211,87.163 ; R19A.1 36.245,87.2 R22A.1 ; v2(38.2,93.4) D9A.K ; C37B.1 51.011,81.9 R19B.1@51.011,87.163 ; R19B.1 51.045,87.2 R22B.1 ; v2(53,93.4) D9B.K ; U6.2@66.35,33.897 66.35,27.125 67.176,26.299 C21.1@69.938,26.299 ; C37D.1 83.427,79.512 R19D.1@83.427,84.775 ; R19D.1 83.461,84.811 R22D.1 ; v2(85.416,91.012) D9D.K ; C7.1 101.057,66.188 101.748,65.497 C8.1 102.01,61.162 C9.1 103.774,62.177 104.174,62.577 R1.1 104.174,65.193 104.474,65.493 U4.3
0V_(ISO): C2.1 C22.1 C23.1 C24.1 C25.1 C26.1 C27.2 C29.2 C31.2 D7.K D8.K ISO1.2 ISO1.8 ISO2.2 ISO2.8 ISO3.4 P3.5 P3.6 P4.1 P5.1 R4.1 U1.4 U6.5 U7.5 U7.18 U7.26 U7.36 | length 29.6
  Signal Top w0.152: D7.K 29.5,48.189 29.5,45.989 D8.K ; C26.1 33.358,41.412 33.484,41.412 U7.36 ; C25.1 34.398,37.223 U7.5 ; U7.26 38.334,43.301 38.874,43.841 38.874,44.338 39.125,44.59 C24.1 ; U7.18 40.87,39.745 41.389,39.225 42.179,39.225 C23.1 ; P3.5 P3.6 ; ISO2.8 48.293,52.008 48.7,51.6 C31.2 ; R4.1@55.5,28.1 55.5,30.564 55.512,30.576 57.676,30.576 58.73,31.63 58.73,33.897 58.73,35.77 v2(58.7,35.8)
3V3: C2.2 C22.2 C23.2 C24.2 C25.2 C26.2 C27.1 C29.1 C31.1 D5.A ISO1.1 ISO1.7 ISO2.1 ISO3.1 P3.7 P3.8 P4.3 P5.4 R5.2 R8.2 R9.2 R10.2 U1.1 U6.7 U7.1 U7.6 U7.19 U7.27 | length 30.1
  Signal Top w0.152: C26.2 33,38.653 U7.1 ; C25.2 35.533,36.017 35.533,37.581 35.859,37.908 U7.6 ; C24.2 37.958,46.142 37.958,44.238 38.237,43.959 38.237,43.89 U7.27 ; U7.19 41.109,41.106 41.656,41.106 C23.2 ; P3.7 P3.8 ; R8.2 52.276,43.124 v2(52.288,43.112) ; R9.2 52.399,47.299 v2(52.4,47.3) ; D5.A@51.074,30.462 51.081,30.469 53.505,30.469 53.612,30.576 53.65,30.614 U6.7@53.65,33.897 ; C31.1 51.37,51.67 ISO3.1 ; v2(55.1,47.4) C2.2 ; U1.1 C2.2 ; C2.2 ccw(c56.495,47.4) C2.2@56.495,47.205 ; C2.2 ccw(c56.495,47.4) C2.2@56.495,47.205 ; C2.2 ccw(c56.495,47.4) C2.2@56.495,47.205 ; C2.2 ccw(c56.495,47.4) C2.2@56.495,47.205
  Signal Top w0.254: U6.7@53.65,33.897 53.675,33.922 53.675,35.775 v2(53.7,35.8)
5V: ADC1A.7 ADC1A.10 ADC1B.7 ADC1B.10 C1.2 C17.2 C19.2 C20.2 C21.2 C28.2 C30.1 C32.2 C33A.2 C33B.2 C34A.2 C34B.2 D4.A ISO1.10 ISO1.16 ISO2.10 ISO2.16 ISO3.8 L2.1 L3.2 R2.1 R12A.2 R12B.2 R16A.2 R16B.2 R16C.2 R16D.2 U1.8 U5.4 | length 3.7
  Signal Top w0.152: C21.2@71.838,26.274 72.038,26.474 72.2,26.636 L3.2@72.2,29.8
_CAN1_N: C5.2 U1.6 U2.3 U3.1
_CAN1_P: C6.2 U1.7 U2.4 U3.2
ADC1_CS: ISO3.2 U7.20
ADC2_CS: ISO3.3 U7.30
ADC_CSA: ADC1A.11 ISO3.7 R12A.1
ADC_CSB: ADC1B.11 ISO3.6 R12B.1
BOOT0: P4.2 R11.1
CAN1_N: C3.2 P1.5 U2.2
CAN1_P: C4.2 P1.4 U2.1
CAN_RX: R8.1 U1.3 U7.23 | length 21.8
  Signal Top w0.152: U7.23 41.84,44.665 48.7,44.665 ; R8.1 48.788,44.577 48.7,44.665 ; U1.3 48.7,44.665
CAN_RX_INDC: R7.2 U7.33 | length 5
  Signal Top w0.152: R7.2 35.075,44.355 34.475,43.755 34.475,42.543 U7.33
CAN_TX: R9.1 U1.2 U7.24 | length 22.3
  Signal Top w0.152: U7.24 42.403,45.935 48.8,45.935 ; R9.1 48.788,45.947 48.8,45.935 ; U1.2 48.8,45.935
CAN_TX_INDC: R6.2 U7.32 | length 6.6
  Signal Top w0.152: R6.2 35.075,47.222 35.294,47.003 35.502,47.003 35.753,46.752 35.753,44.531 34.891,43.669 34.891,42.834 U7.32
DIAG_ENA: ADC1A.6 R14A.1
DIAG_ENB: ADC1A.2 R14B.1
DIAG_ENC: ADC1B.6 R14C.1
DIAG_END: ADC1B.2 R14D.1
FAULTA: ADC1A.5 R17A.1
FAULTB: ADC1A.1 R17B.1
FAULTC: ADC1B.5 R17C.1
FAULTD: ADC1B.1 R17D.1
GLV+: C36A.2 C36B.2 C36C.2 C36D.2 F1.1 P1.12 U8A.8 U8A.9 U8A.10 U8B.8 U8B.9 U8B.10 U8C.8 U8C.9 U8C.10 U8D.8 U8D.9 U8D.10 | length 21.2
  Signal Top w0.152: U8C.10 11.223,96.416 U8C.9@11.873,96.416 ; C36C.2 11.873,98.773 U8C.9@11.873,96.416 ; U8C.8 12.523,96.391 11.873,96.391 U8C.9 U8C.9@11.873,96.416 ; U8A.10 32.306,97.705 U8A.9@32.956,97.705 ; C36A.2 32.956,100.061 U8A.9@32.956,97.705 ; U8A.8 33.606,97.679 32.956,97.679 U8A.9 U8A.9@32.956,97.705 ; U8B.10 47.106,97.705 U8B.9@47.756,97.705 ; C36B.2 47.756,100.061 U8B.9@47.756,97.705 ; U8B.8 48.406,97.679 47.756,97.679 U8B.9 U8B.9@47.756,97.705 ; U8D.10@79.523,95.312 79.523,95.316 U8D.9@80.173,95.316 ; C36D.2 80.173,97.673 U8D.9@80.173,95.316 ; U8D.8@80.823,95.312 80.823,95.291 80.173,95.291 80.173,95.312 U8D.9@80.173,95.316 ; 102.03,103.121 103.29,101.861 105.113,101.861 106.149,100.825 F1.1
GLV-: C10.1 C11.1 C12.1 C36A.1 C36B.1 C36C.1 C36D.1 C38A.1 C38B.1 C38C.1 C38D.1 D3.K D10A.K D10B.K D10C.K D10D.K P1.1 P1.11 P2.5 P2.6 P2.7 P2.8 U4.4 | length 31.7
  Signal Top w0.152: D10B.K@45.038,103.874 45.038,101.838 45.082,101.794 47.778,101.794 C36B.1 ; D10D.K 77.454,99.45 77.498,99.406 80.194,99.406 C36D.1 ; D3.K 104.293,93.543 C10.1 104.293,84.692 C12.1 104.249,84.562 C11.1@104.249,79.962 ; C11.1 C11.1@104.249,79.962 ; U4.4 104.249,77.387 C11.1@104.249,79.962
  Signal Top w0.254: D10A.K 30.219,103.855 30.219,101.819 C38A.1 30.206,101.794 32.978,101.794 C36A.1
HB: D6.K U7.34 | length 4.1
  Signal Top w0.152: D6.K 32.812,43.499 U7.34
HSD1_EN(MCU): ISO2.6 U7.8
HSD2_EN(MCU): ISO2.5 U7.9
HSD3_EN(MCU): ISO2.4 U7.10
HSD4_EN(MCU): ISO2.3 U7.15
HSD_EN1: ISO2.11 R13A.1
HSD_EN2: ISO2.12 R13B.1
HSD_EN3: ISO2.13 R13C.1
HSD_EN4: ISO2.14 R13D.1
LATCHA: ADC1A.4 R15A.1
LATCHB: ADC1A.16 R15B.1
LATCHC: ADC1B.4 R15C.1
LATCHD: ADC1B.16 R15D.1
MISO: ISO1.6 U7.13
MOSI: ISO1.4 U7.14
NetADC1A_8: ADC1A.8 C35A.2
NetADC1B_8: ADC1B.8 C35B.2
NetC10_2: C10.2 D1.A D3.A F1.2 | length 12.5
  Signal Top w0.152: F1.2 98.849,96.384 98.864,96.368 98.864,93.862 D3.A 100.893,91.743 D1.A 100.893,89.932 102.593,89.932 C10.2
NetC16_2: C16.2 U5.3
NetC18_2: C18.2 U5.2
NetD2_K: D2.K R1.2 | length 2.1
  Signal Top w0.152: R1.2 105.874,61.4 D2.K
NetD4_K: D4.K R3.2
NetD5_K: D5.K R4.2 | length 2.9
  Signal Top w0.152: D5.K@51.074,28.562 51.494,28.142 51.795,28.142 51.837,28.1 R4.2@53.8,28.1
NetD6_A: D6.A R5.1 | length 2.1
  Signal Top w0.152: R5.1 29.562,43.575 D6.A
NetD7_A: D7.A R6.1 | length 2.2
  Signal Top w0.152: D7.A 31.725,47.864 33.361,47.864 R6.1
NetD8_A: D8.A R7.1 | length 2.1
  Signal Top w0.152: D8.A 31.823,46.338 33.338,46.338 R7.1
NetD9A_A: D9A.A R20A.1 R22A.2 U8A.0 U8A.1 | length 14.7
  Signal Top w0.152: U8A.1 29.706,93 30.356,93.65 v1(30.556,93.65) ; v1(31.656,94.75) v2(32.756,94.75) 32.906,94.6 D9A.A ; D9A.A@36.15,94.75 D9A.A ; R20A.1 R20A.1@36.306,89.025 ; R22A.2 37.931,89.025 R20A.1@36.306,89.025 ; D9A.A 36.3,89.031 R20A.1@36.306,89.025
  other v1: 31.656,93.65 32.756,93.65 30.556,94.75 32.756,94.75 30.556,95.85 31.656,95.85 32.756,95.85
NetD9B_A: D9B.A R20B.1 R22B.2 U8B.0 U8B.1 | length 14.7
  Signal Top w0.152: U8B.1 44.506,93 45.156,93.65 v1(45.356,93.65) ; v1(46.456,94.75) v2(47.556,94.75) 47.706,94.6 D9B.A ; D9B.A@50.95,94.75 D9B.A ; R20B.1 R20B.1@51.106,89.025 ; R22B.2 52.731,89.025 R20B.1@51.106,89.025 ; D9B.A 51.1,89.031 R20B.1@51.106,89.025
  other v1: 46.456,93.65 47.556,93.65 45.356,94.75 47.556,94.75 45.356,95.85 46.456,95.85 47.556,95.85
NetD9C_A: D9C.A R20C.1 R22C.2 U8C.0 U8C.1 | length 14.7
  Signal Top w0.152: U8C.1 8.623,91.712 9.273,92.362 v1(9.473,92.362) ; v1(10.573,93.462) v1(11.673,93.462) ; U8C.0@11.823,93.312 v1(11.673,93.462) ; R20C.1 R20C.1@15.223,87.737 ; R22C.2 16.848,87.737 R20C.1@15.223,87.737 ; v1(11.673,93.462) 15.066,93.462 D9C.A 15.216,87.743 R20C.1@15.223,87.737
  other v1: 10.573,92.362 11.673,92.362 9.473,93.462 9.473,94.562 10.573,94.562 11.673,94.562
NetD9D_A: D9D.A R20D.1 R22D.2 U8D.0 U8D.1 | length 18.1
  Signal Top w0.152: U8D.1@76.923,89.412 76.923,90.612 77.573,91.262 U8D.0@77.773,91.262 ; U8D.0@78.873,92.362 v2(79.973,92.362) ; R20D.1 R20D.1@83.523,86.637 ; R22D.2 85.148,86.637 R20D.1@83.523,86.637 ; v2(79.973,92.362) 80.123,92.212 D9D.A ; v2(79.973,92.362) 83.366,92.362 D9D.A ; D9D.A 83.516,86.643 R20D.1@83.523,86.637
  other v1: 77.767,91.262 78.867,91.262 79.967,91.262 77.767,92.362 78.867,92.362 79.967,92.362 77.767,93.462 78.867,93.462 79.967,93.462
NetD10A_A: D10A.A R21A.1 | length 2.1
  Signal Top w0.152: R21A.1 28.481,103.886 D10A.A@28.519,103.924
NetD10B_A: D10B.A R21B.1 | length 2.1
  Signal Top w0.152: R21B.1@43.281,101.85 43.281,103.886 D10B.A@43.319,103.924
NetD10C_A: D10C.A R21C.1 | length 2.1
  Signal Top w0.152: R21C.1 7.398,102.597 D10C.A@7.436,102.635
NetD10D_A: D10D.A R21D.1 | length 2.1
  Signal Top w0.152: R21D.1@75.698,99.462 75.698,101.497 D10D.A@75.736,101.535
NetL3_1: L3.1 U6.1 | length 4.4
  Signal Top w0.152: L3.1@68.05,29.85 68.6,30.4 68.6,33.61 68.889,33.899 U6.1@68.89,33.897
NetR2_2: R2.2 U5.6
NetR11_2: R11.2 U7.35
NetR13A_2: R13A.2 U8A.2 | length 8.2
  Signal Top w0.152: R13A.2 26.033,86.17 30.356,90.493 U8A.2
NetR13B_2: R13B.2 U8B.2
NetR13C_2: R13C.2 U8C.2
NetR13D_2: R13D.2 U8D.2 | length 9
  Signal Top w0.152: R13D.2@73.25,82.975 73.25,84.682 74.816,86.248 76.099,86.248 77.573,87.722 U8D.2@77.573,89.412
NetR14A_2: R14A.2 U8A.3 | length 8
  Signal Top w0.152: 27.557,86.594 31.006,90.043 U8A.3
  Signal Top w0.254: R14A.2 27.346,86.383 27.557,86.594
NetR14B_2: R14B.2 U8B.3 | length 8
  Signal Top w0.152: R14B.2 42.146,85.843 45.806,89.503 U8B.3
NetR14C_2: R14C.2 U8C.3 | length 16.9
  Signal Top w0.152: 4.95,84.075 4.95,85.782 6.516,87.348 7.799,87.348 9.273,88.822 9.273,90.512 ; 6.262,84.554 9.923,88.215 U8C.3
  Signal Bottom w0.152: 66.361,71.851 66.361,72.331
NetR14D_2: R14D.2 U8D.3 | length 8
  Signal Top w0.152: R14D.2 74.562,83.454 78.223,87.115 U8D.3@78.223,89.412
NetR15A_2: R15A.2 U8A.5 | length 6.7
  Signal Top w0.152: U8A.5 32.306,86.075 32.981,85.4 R15A.2
NetR15B_2: R15B.2 U8B.5 | length 6.7
  Signal Top w0.152: U8B.5 47.106,86.075 47.781,85.4 R15B.2
NetR15C_2: R15C.2 U8C.5 | length 6.7
  Signal Top w0.152: U8C.5 11.223,84.787 11.898,84.112 R15C.2
NetR15D_2: R15D.2 U8D.5 | length 6.7
  Signal Top w0.152: U8D.5@79.523,89.412 79.523,83.687 80.198,83.012 R15D.2
NetR16A_1: R16A.1 R17A.2 U8A.4
NetR16B_1: R16B.1 R17B.2 U8B.4 | length 18
  Signal Top w0.152: 18.831,87.125 18.831,88.832 ; 40.833,87.07 42.4,88.637 43.683,88.637 45.156,90.11 45.156,91.8 ; R17B.2 R16B.1 43.581,85.881 46.456,88.756 U8B.4
NetR16C_1: R16C.1 R17C.2 U8C.4 | length 9
  Signal Top w0.152: 7.698,84.593 10.573,87.468 U8C.4
  Signal Bottom w0.152: 64.926,70.438 64.926,71.938 64.926,72.369
NetR16D_1: R16D.1 R17D.2 U8D.4 | length 9
  Signal Top w0.152: R17D.2 R16D.1 75.998,83.493 78.873,86.368 U8D.4@78.873,89.412
NetR18A_2: R18A.2 R19A.2 U8A.6 | length 7.2
  Signal Top w0.152: U8A.6 32.956,88.666 34.459,87.163 R19A.2 34.409,87.063 R18A.2
NetR18B_2: R18B.2 R19B.2 U8B.6 | length 7.2
  Signal Top w0.152: U8B.6 47.756,88.666 49.259,87.163 R19B.2 49.209,87.063 R18B.2
NetR18C_2: R18C.2 R19C.2 U8C.6 | length 7.2
  Signal Top w0.152: U8C.6 11.873,87.377 13.375,85.875 R19C.2 13.325,85.775 R18C.2
NetR18D_2: R18D.2 R19D.2 U8D.6 | length 7.2
  Signal Top w0.152: U8D.6@80.173,89.412 80.173,86.277 81.675,84.775 R19D.2 81.625,84.675 R18D.2
NetR20A_2: R20A.2 U8A.7 | length 3.2
  Signal Top w0.152: U8A.7 33.606,89.975 R20A.2 R20A.2@34.606,89.025
NetR20B_2: R20B.2 U8B.7 | length 3.2
  Signal Top w0.152: U8B.7 48.406,89.975 R20B.2 R20B.2@49.406,89.025
NetR20C_2: R20C.2 U8C.7 | length 3.2
  Signal Top w0.152: U8C.7 12.523,88.687 R20C.2 R20C.2@13.523,87.737
NetR20D_2: R20D.2 U8D.7 | length 3.2
  Signal Top w0.152: U8D.7@80.823,89.412 80.823,87.587 R20D.2 R20D.2@81.823,86.637
NRST: P3.1 R10.1 U7.4 | length 4.4
  Signal Top w0.152: R10.1 33.1,37.2 34.258,38.358 34.756,38.358 35.083,38.684 U7.4
SCLCK: ISO1.5 U7.12
SCLCKA: ADC1A.13 ADC1B.13 ISO1.12
SDIA: ADC1A.14 ADC1B.14 ISO1.13
SDOA: ADC1A.12 ADC1B.12 ISO1.11
SNSA: ADC1A.3 C37A.2 R18A.1 | length 1.9
  Signal Top w0.152: R18A.1 34.409,81.9 C37A.2
SNSB: ADC1A.15 C37B.2 R18B.1 | length 1.9
  Signal Top w0.152: R18B.1 49.209,81.9 C37B.2
SNSC: ADC1B.3 C37C.2 R18C.1 | length 1.9
  Signal Top w0.152: R18C.1 13.325,80.612 C37C.2@13.423,80.612
SNSD: ADC1B.15 C37D.2 R18D.1 | length 1.9
  Signal Top w0.152: R18D.1 81.625,79.512 C37D.2
SWCLK: P3.4 U7.28
SWDIO: P3.2 U7.25
Switch: C18.1 L2.2 U5.1
UART_RX: P5.2 U7.22
UART_TX: P5.3 U7.21
VBAT_C: C7.2 L1.2 U4.2 | length 6.5
  Signal Top w0.152: U4.2 98.356,69.44 98.356,66.188 C7.2 98.336,63.162 L1.2
VBAT_D: C11.2 C12.2 D1.K U4.1 | length 19.5
  Signal Top w0.152: D1.K 97.693,87.434 99.124,86.003 C12.2 101.252,84.562 101.824,83.99 101.824,82.762 102.574,82.012 C11.2 102.574,78.713 101.023,77.162 U4.1
VBAT_F: C8.2 C9.2 C13.2 C14.2 C15.2 D2.A L1.1 U5.7 U5.8 U5.9 | length 7.7
  Signal Top w0.152: L1.1 98.915,59.562 98.953,59.524 C8.2 101.748,59.528 103.774,59.528 C9.2@103.774,59.503 ; C9.2 C9.2@103.774,59.503 ; D2.A 105.9,59.503 C9.2@103.774,59.503
VOUT_1: C38A.2 P2.4 R21A.2 U8A.12 U8A.13 U8A.14 | length 8.3
  Signal Top w0.152: 26.4,101 27.25,100.15 R21A.2 28.481,100.118 C38A.2@30.456,100.118 ; U8A.14 29.706,97.705 U8A.13@30.356,97.705 ; C38A.2@30.456,100.125 C38A.2@30.456,100.118 ; U8A.12 31.006,97.679 30.356,97.679 U8A.13 U8A.13@30.356,97.705 ; U8A.13@30.356,97.705 30.356,99.786 30.456,99.885 C38A.2@30.456,100.118
VOUT_2: C38B.2 P2.3 R21B.2 U8B.12 U8B.13 U8B.14 | length 10.9
  Signal Top w0.152: 41.2,103.668 41.2,101 42.05,100.15 43.281,100.15 R21B.2 45.256,100.118 45.256,99.885 45.156,99.786 U8B.13@45.156,97.705 ; U8B.14 44.506,97.705 U8B.13@45.156,97.705 ; U8B.12 45.806,97.679 45.156,97.679 U8B.13@45.156,97.705
VOUT_3: C38C.2 P2.2 R21C.2 U8C.12 U8C.13 U8C.14 | length 8.2
  Signal Top w0.152: 5.316,99.712 6.166,98.862 R21C.2 7.398,98.829 9.373,98.829 9.373,98.597 9.273,98.497 U8C.13@9.273,96.416 ; U8C.14@8.623,96.416 U8C.13@9.273,96.416 ; U8C.12 9.923,96.391 9.273,96.391 U8C.13@9.273,96.416
VOUT_4: C38D.2 P2.1 R21D.2 U8D.12 U8D.13 U8D.14 | length 11.6
  Signal Top w0.152: 73.616,101.912 73.616,98.612 74.466,97.762 75.698,97.762 R21D.2 C38D.2@77.673,97.729 ; U8D.14@76.923,95.312 76.923,95.316 U8D.13@77.573,95.316 ; C38D.2@77.673,97.737 C38D.2@77.673,97.729 ; U8D.12@78.223,95.312 78.223,95.291 77.573,95.291 U8D.13@77.573,95.316 ; U8D.13@77.573,95.316 77.573,97.397 77.673,97.497 C38D.2@77.673,97.729
pads on no net: ADC1A.17 ADC1B.17 ISO1.3 ISO1.14 ISO2.7 P1.0 P1.2 P1.3 P1.6 P1.7 P1.8 P1.9 P1.10 P3.3 P3.9 P3.10 TP1.1 U7.2 U7.3 U7.7 U7.11 U7.16 U7.17 U7.29 U7.31 U7.37 U8A.11 U8B.11 U8C.11 U8D.11

## Polygon pours and split planes (outlines as drawn)
3V3 on Int2 (PWR) "3V3_L03_P012" (solid, pour order 12): 24.987,54.725 56.375,54.775 59.9,48.4 59.9,24.95 26.245,24.95 cw(c26.265,26.249) 24.975,26.1
0V_(ISO) on Int1 (GND) "0V_(ISO)_L02_P013" (solid, pour order 13): 24.987,54.725 56.375,54.775 59.9,48.4 59.9,24.95 26.245,24.95 cw(c26.265,26.249) 24.975,26.1

## Other copper
Int1 (GND):
  pour cut-out: 33.685,31.8 25.9,31.8 25.9,29.1 33.685,29.1
  pour cut-out: 36.225,28.475 36.225,25.775 25.925,25.775 25.9,25.8 25.9,28.5
  pour cut-out: 36.436,22.1 34.436,22.1 34.436,20.071 36.436,20.071
  pour cut-out: 54.098,32.679 54.383,32.844 54.616,33.077 54.781,33.363 54.866,33.681 54.866,34.01 54.781,34.329 54.616,34.614 54.383,34.847 54.098,35.012 53.78,35.097 53.45,35.097 53.132,35.012 52.846,34.847 52.613,34.614 52.449,34.329 52.363,34.01 52.363,33.681 52.449,33.363 52.613,33.077 52.846,32.844 53.132,32.679 53.45,32.594 53.78,32.594
  pour cut-out: 59.178,32.679 59.463,32.844 59.696,33.077 59.861,33.363 59.946,33.681 59.946,34.01 59.861,34.329 59.696,34.614 59.463,34.847 59.178,35.012 58.86,35.097 58.53,35.097 58.212,35.012 57.926,34.847 57.693,34.614 57.529,34.329 57.443,34.01 57.443,33.681 57.529,33.363 57.693,33.077 57.926,32.844 58.212,32.679 58.53,32.594 58.86,32.594
Int2 (PWR):
  pour cut-out: 33.685,31.8 25.9,31.8 25.9,29.1 33.685,29.1
  pour cut-out: 36.225,28.475 36.225,25.775 25.925,25.775 25.9,25.8 25.9,28.5
  pour cut-out: 59.178,32.679 59.463,32.844 59.696,33.077 59.861,33.363 59.946,33.681 59.946,34.01 59.861,34.329 59.696,34.614 59.463,34.847 59.178,35.012 58.86,35.097 58.53,35.097 58.212,35.012 57.926,34.847 57.693,34.614 57.529,34.329 57.443,34.01 57.443,33.681 57.529,33.363 57.693,33.077 57.926,32.844 58.212,32.679 58.53,32.594 58.86,32.594
  pour cut-out: 59.178,32.679 59.463,32.844 59.696,33.077 59.861,33.363 59.946,33.681 59.946,34.01 59.861,34.329 59.696,34.614 59.463,34.847 59.178,35.012 58.86,35.097 58.53,35.097 58.212,35.012 57.926,34.847 57.693,34.614 57.529,34.329 57.443,34.01 57.443,33.681 57.529,33.363 57.693,33.077 57.926,32.844 58.212,32.679 58.53,32.594 58.86,32.594
  pour cut-out: 54.133,32.731 54.418,32.896 54.651,33.129 54.816,33.414 54.901,33.732 54.901,34.062 54.816,34.38 54.651,34.666 54.418,34.899 54.133,35.063 53.815,35.149 53.485,35.149 53.167,35.063 52.882,34.899 52.649,34.666 52.484,34.38 52.398,34.062 52.398,33.732 52.484,33.414 52.649,33.129 52.882,32.896 53.167,32.731 53.485,32.646 53.815,32.646

## Text inside footprints (layer, text, board x,y; h text height)
C12: Top Overlay "+" at 107.37,81.062 h1.52 r180